# Altium PCB pay-optical.PcbDoc (part 1 of 5)
Units mm, origin at the board's own origin, x right, y up, seen from the top; angles counter-clockwise.
Board outline 128 x 54 mm, 4 copper layers (Top Layer, GND, VCC, Bottom Layer), stack 0.778 mm thick; 461 components, 247 nets, 1368 pads, 498 vias.
Unrouted connection lines stored in the file: 117.
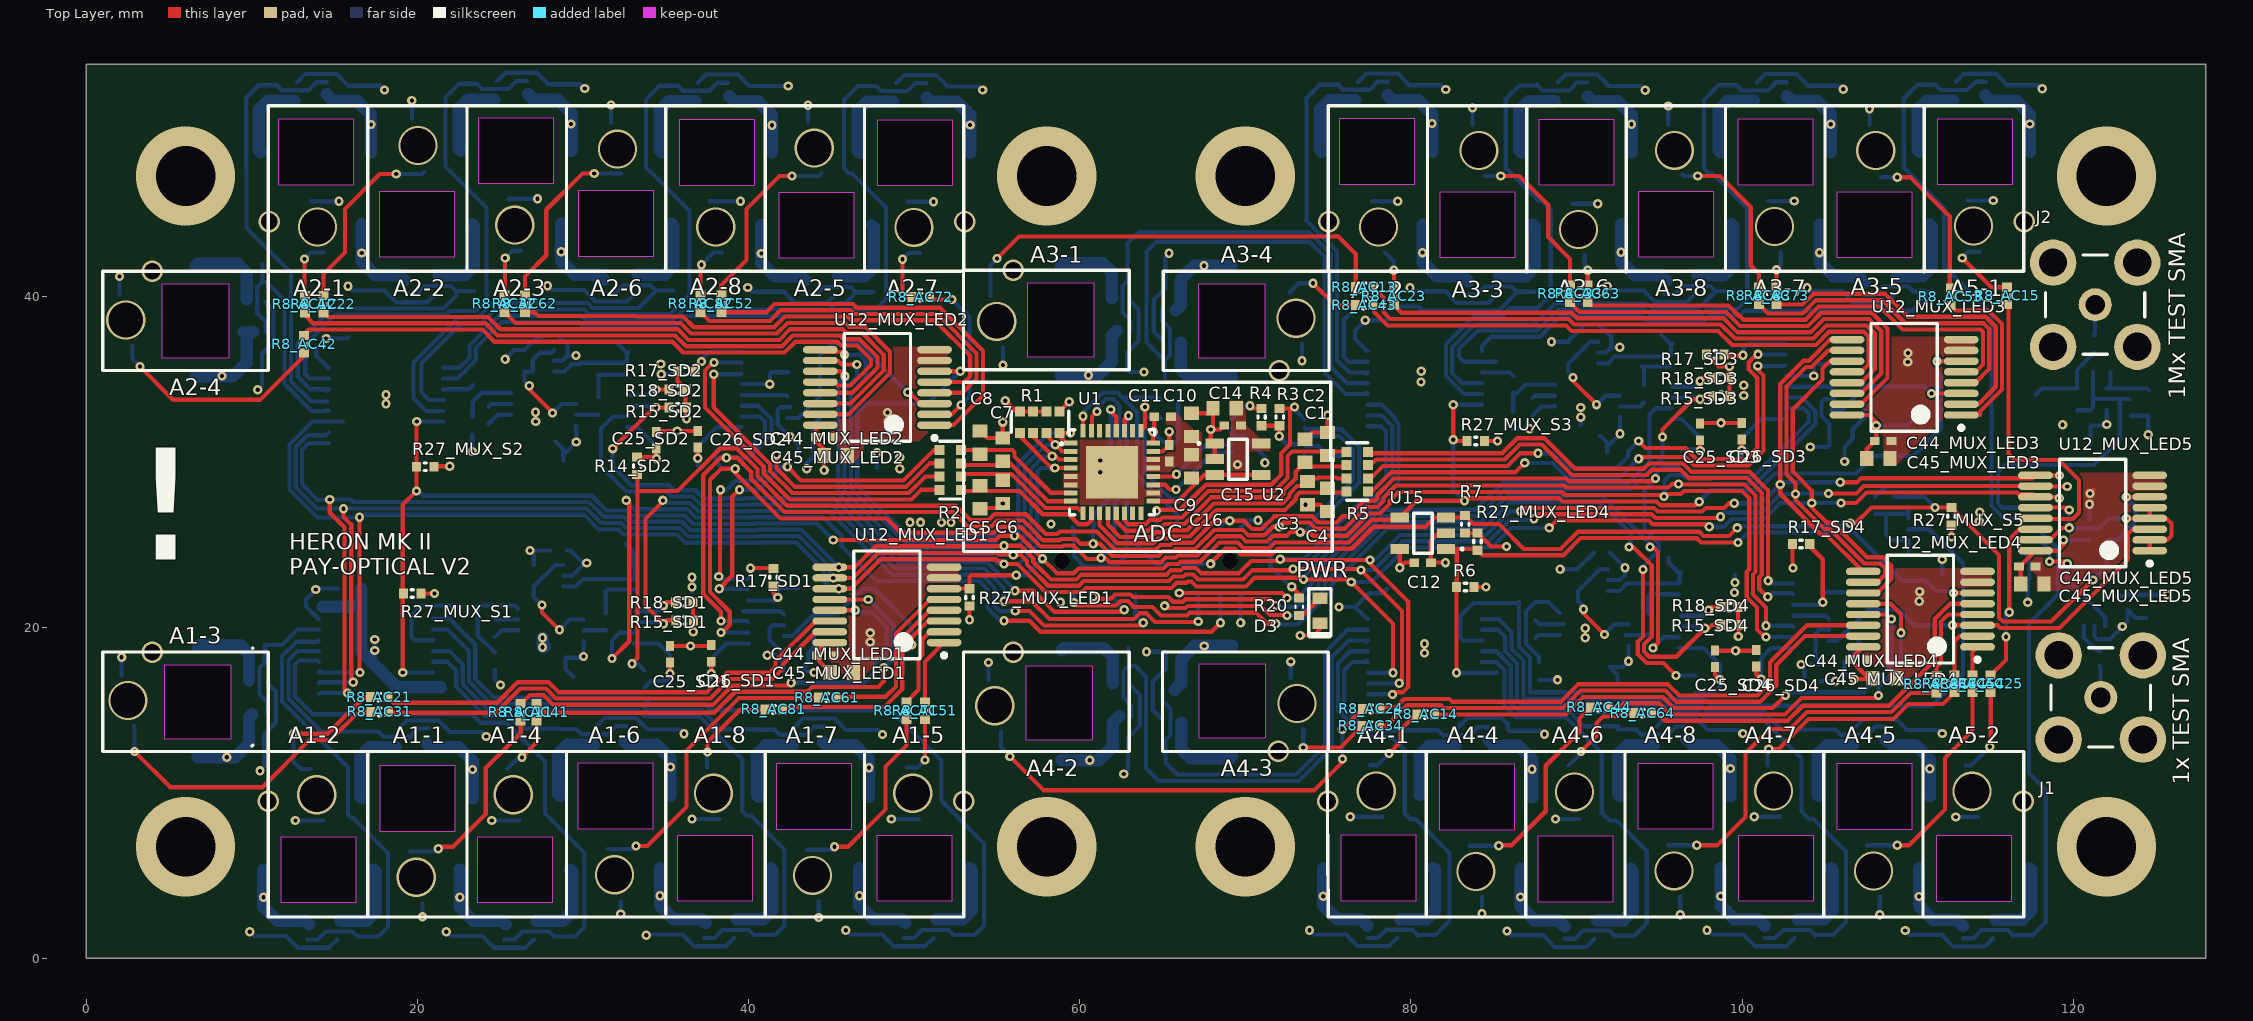
[diagram p0: Top Layer view]
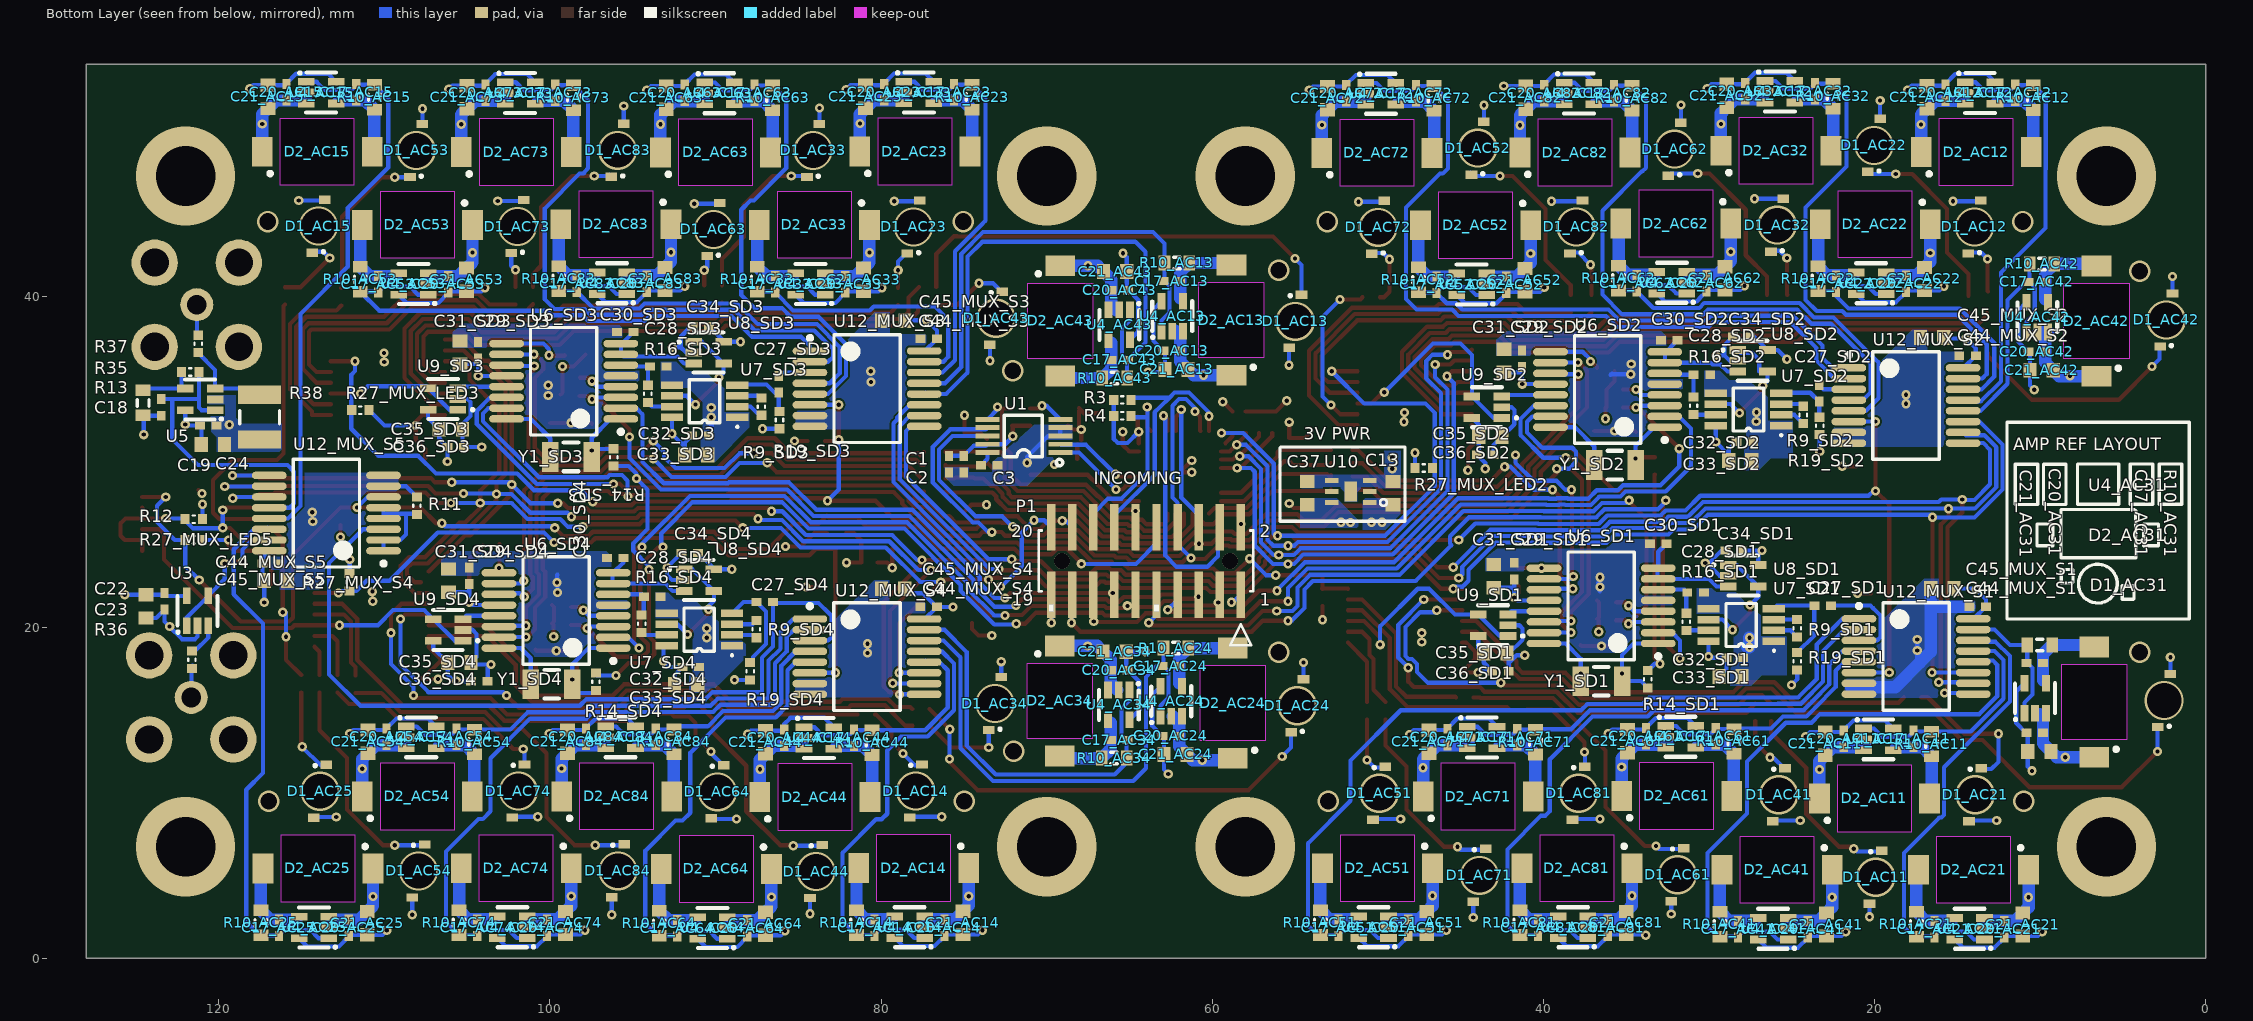
[diagram p1: Bottom Layer view, seen from below]
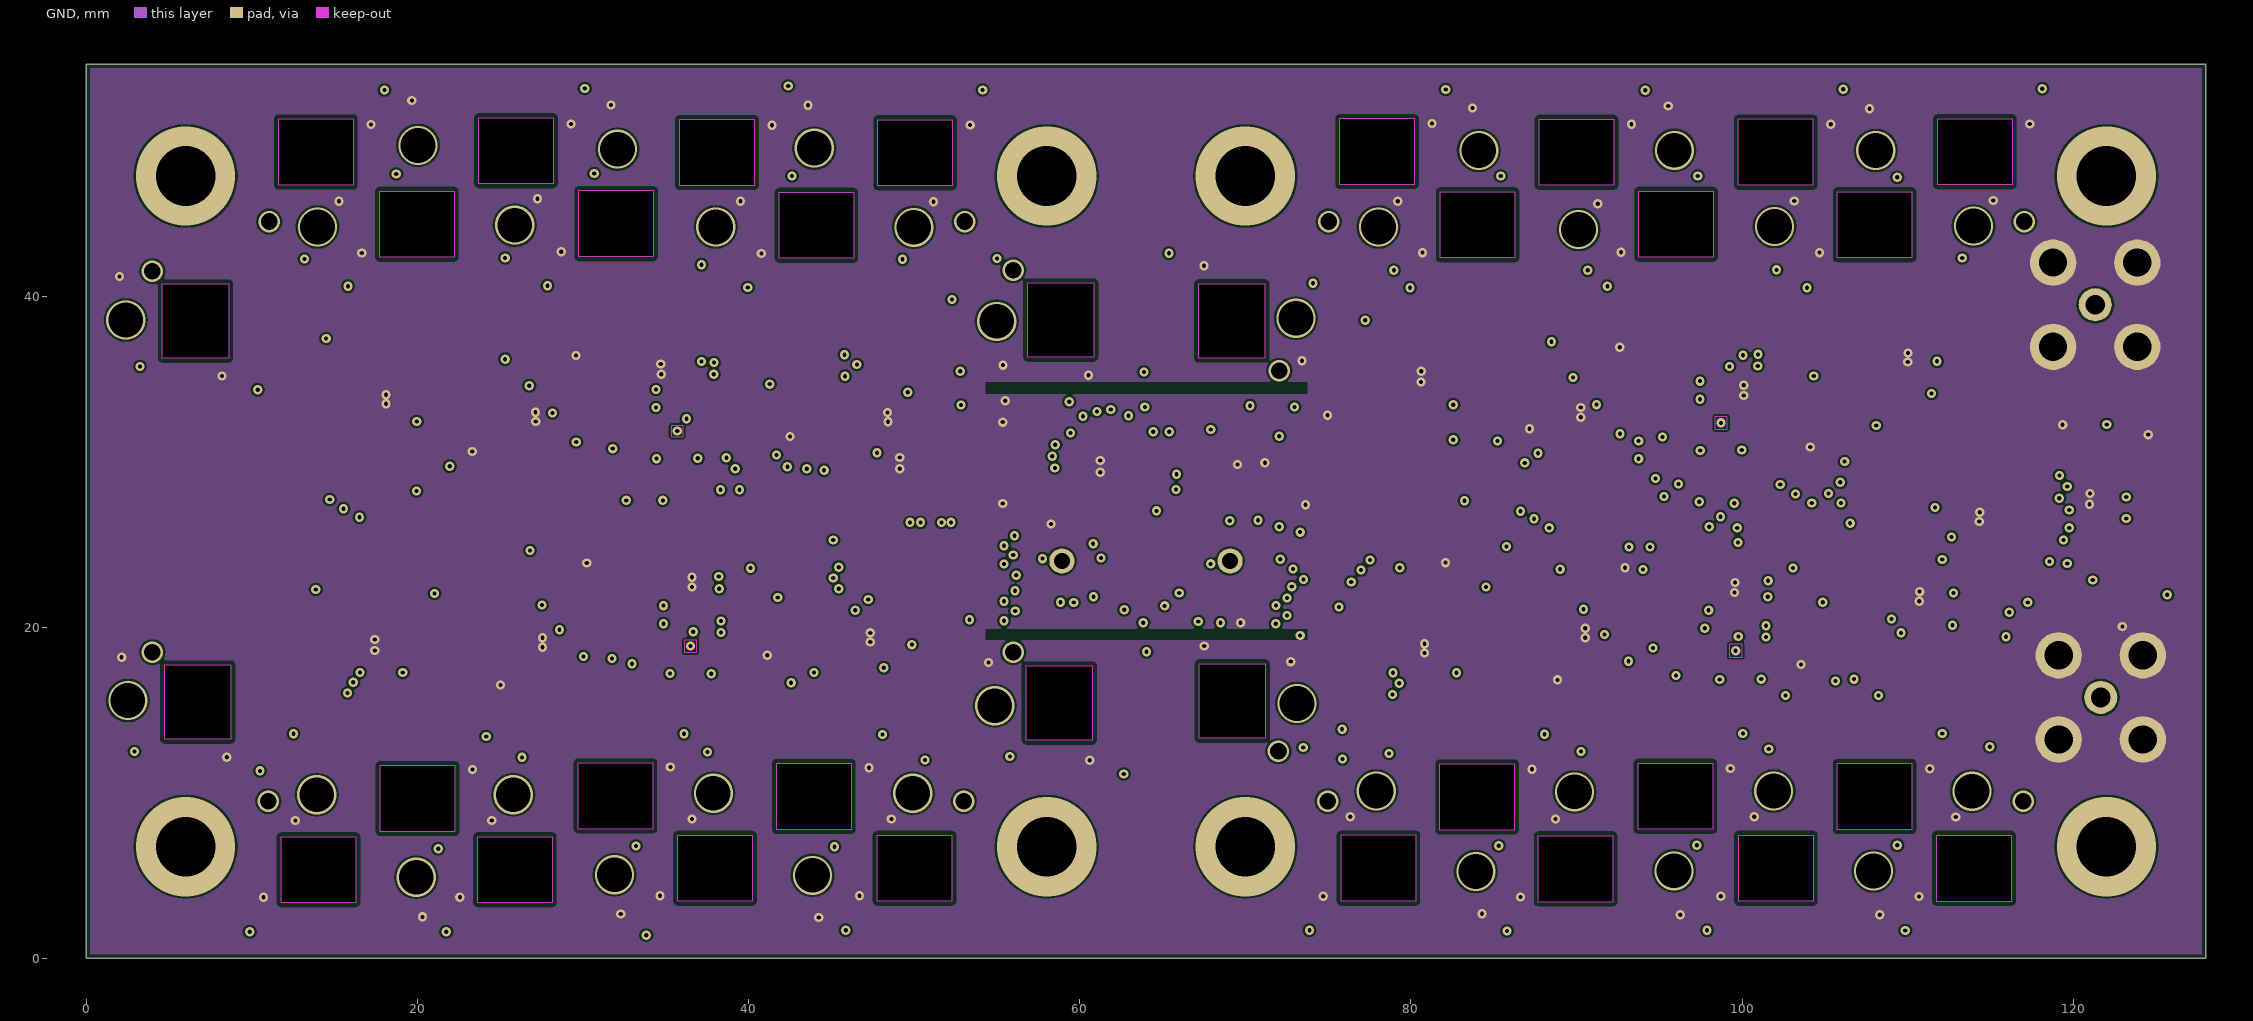
[diagram p2: GND]
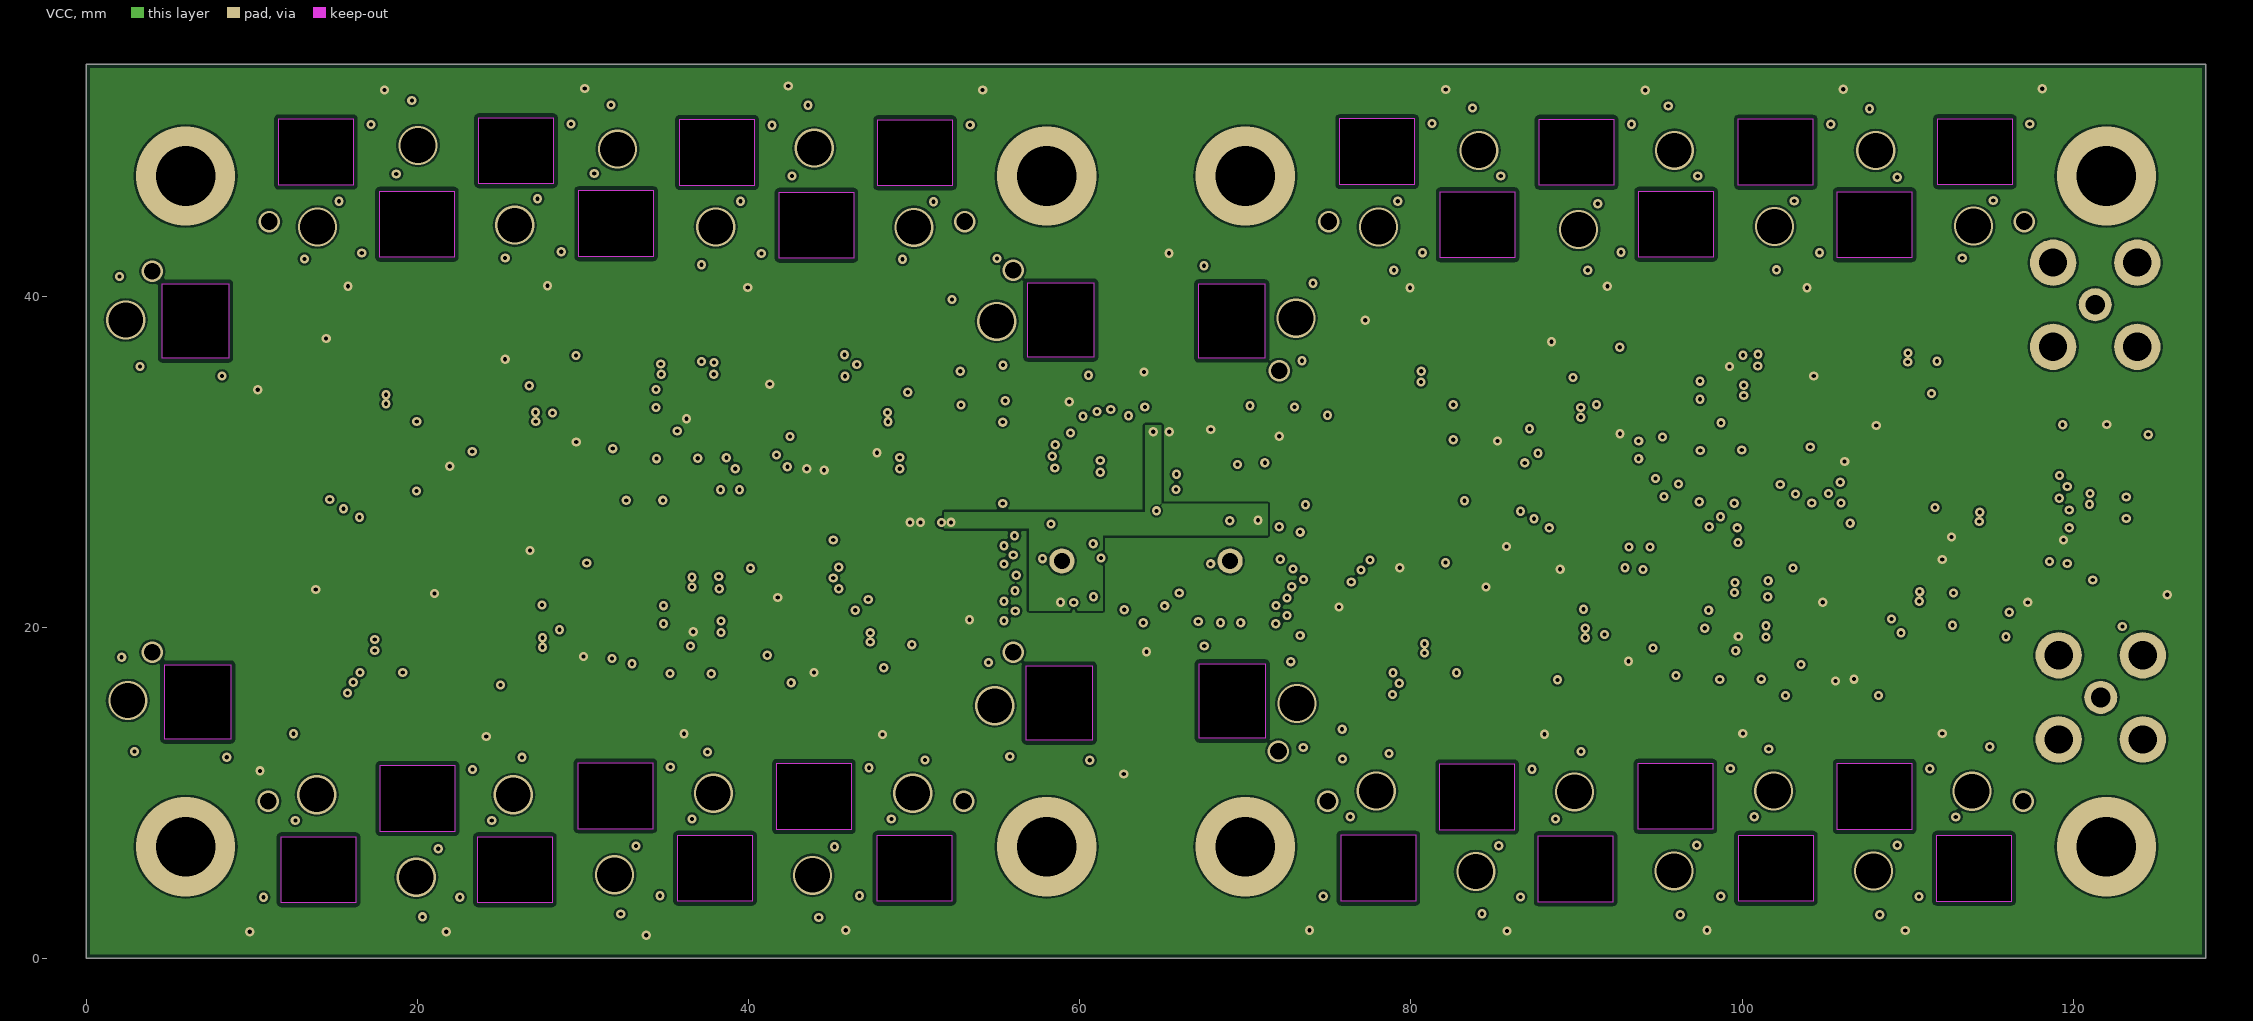
[diagram p3: VCC]

## Layer stack, top to bottom
Top Solder: solder mask 0.0102, Solder Resist, Dk 3.5
Top Layer: signal copper 0.0356
Dielectric 1: core 0.254, FR-4, Dk 4.2
GND: signal copper 0.036
Dielectric 6: prepreg 0.127, Dk 4.2
VCC: signal copper 0.036
Dielectric 4: core 0.254, Dk 4.2
Bottom Layer: signal copper 0.0356
Bottom Solder: solder mask 0.0102, Solder Resist, Dk 3.5

## Board outline
0,0 128,0 128,54 0,54

## Design rules (kind name [scope] priority, off if disabled: settings)
AssemblyTestPointUsage [All] p1 off:
AssemblyTestpoint [All] p1 off: testpointundercomponent=TRUE minsize=1.016 maxsize=2.54 preferedsize=1.524 minholesize=0 maxholesize=1.016 preferedholesize=0.813 testpointgrid=0.025 usegrid=TRUE gridtolerance=0 allowsidetop=TRUE allowsidebottom=TRUE
BoardOutlineClearance [OnLayer('VCC') or OnLayer('GND')] p1: gap=0.381 ignorepadtopadclearanceinfootprint=FALSE // Inner layer clearance
BoardOutlineClearance BoardOutlineClearance_1 [All] p2: gap=0.254 ignorepadtopadclearanceinfootprint=FALSE // top and bottom layers
Clearance [All] p1: gap=0.127 ignorepadtopadclearanceinfootprint=FALSE except(0: Arc-Hole Track-Hole SMDPad-Hole THPad-Hole Via-Hole Fill-Hole Poly-Hole Region-Hole Text-Hole)
FabricationTestPointUsage [All] p1 off: valid=0 allowmultiple=FALSE
FabricationTestpoint [All] p1 off: side=3 testpointundercomponent=FALSE minsize=1.016 maxsize=2.54 preferedsize=1.524 minholesize=0 maxholesize=1.016 preferedholesize=0.813 testpointgrid=0.025 allowsidetop=TRUE allowsidebottom=TRUE usegrid=TRUE gridtolerance=0
HoleSize [All] p1: absolutevalues=TRUE maxlimit=6.35 minlimit=0.203 maxpercent=80.000 minpercent=20.000
MinimumAnnularRing [All] p1: minimumring=0.127
MinimumSolderMaskSliver [All] p1: minsoldermaskwidth=0.102
PlaneConnect [All] p1: planeconnectstyle=Direct reliefexpansion=0.508 reliefentries=4 reliefconductorwidth=0.254 reliefairgap=0.254
PolygonConnect [All] p1: connectstyle=Direct reliefconductorwidth=0.254 reliefentries=4 polygonreliefangle="90 Angle" airgapwidth=0.254
RoomDefinition SD5_Special [InComponentClass('SD5_Special')] p1: confinementstyle=ConfineIn formatcopy=TRUE lockcomponents=FALSE outline 0,0 50.8,0 50.8,25.4 0,25.4
RoomDefinition pay-optical [InComponentClass('pay-optical')] p2: confinementstyle=ConfineIn formatcopy=TRUE lockcomponents=FALSE outline 0,0 50.8,0 50.8,25.4 0,25.4
RoomDefinition AC74 [InComponentClass('AC74')] p3: confinementstyle=ConfineIn formatcopy=TRUE lockcomponents=FALSE outline 100.928,12.156 103.239,12.156 103.239,11.512 104.289,11.512 104.289,7.711 106.339,7.711 106.339,3.19 106.337,0.596 104.039,0.596 104.039,0 100.528,0 100.528,0.296 99.629,0.296 98.329,0.296 98.127,0.296 97.683,0.296 97.728,7.711 99.978,7.711 99.978,11.512 100.928,11.512
RoomDefinition U_amplifier-special [InComponentClass('U_amplifier-special')] p4: confinementstyle=ConfineIn formatcopy=TRUE lockcomponents=FALSE outline 114.8,3.684 127.9,3.684 127.9,44.132 114.8,44.132
RoomDefinition AC62 [InComponentClass('AC62')] p5: confinementstyle=ConfineIn formatcopy=TRUE lockcomponents=FALSE outline 30.901,51.613 33.212,51.613 33.212,50.436 34.262,50.436 34.262,46.634 36.312,46.634 36.312,42.113 36.31,39.52 34.012,39.52 34.012,38.923 30.501,38.923 30.501,39.22 29.602,39.22 28.302,39.22 28.1,39.22 27.656,39.22 27.701,46.634 29.951,46.634 29.951,50.436 30.901,50.436
RoomDefinition AC12 [InComponentClass('AC12')] p6: confinementstyle=ConfineIn formatcopy=TRUE lockcomponents=FALSE outline 14.973,41.988 12.662,41.988 12.662,42.632 11.612,42.632 11.612,46.433 9.562,46.433 9.562,50.955 9.564,53.548 11.862,53.548 11.862,54.144 15.373,54.144 15.373,53.848 16.271,53.848 17.571,53.848 17.773,53.848 18.217,53.848 18.173,46.433 15.923,46.433 15.923,42.632 14.973,42.632
RoomDefinition MUX_S1 [InComponentClass('MUX_S1')] p7: confinementstyle=ConfineIn formatcopy=TRUE lockcomponents=FALSE outline 12.442,14.432 12.442,22.04 14.408,22.04 14.408,23.189 17.416,23.189 17.416,22.04 22.55,22.04 22.55,14.432
RoomDefinition U_dac-layout [InComponentClass('U_dac-layout')] p8: confinementstyle=ConfineIn formatcopy=TRUE lockcomponents=FALSE outline 67.925,27.875 76.5,27.875 76.5,34.125 67.925,34.125
RoomDefinition U_adc-optical [InComponentClass('U_adc-optical')] p9: confinementstyle=ConfineIn formatcopy=TRUE lockcomponents=FALSE outline 51.901,29.291 51.901,30.602 56.861,30.602 56.861,34.057 61.938,34.057 61.938,33.14 70.094,33.14 70.094,30.162 70.985,30.162 70.985,24.705 75.718,24.705 75.718,22.241 76.157,22.241 76.157,20.533 60.149,20.533 60.149,21.051 56.257,21.051 56.257,21.897 54.31,21.897 54.31,25.374 53.092,25.374 53.092,29.291
RoomDefinition SD4 [InComponentClass('SD4')] p10: confinementstyle=ConfineIn formatcopy=TRUE lockcomponents=FALSE outline 85.816,20.87 85.816,22.178 89.238,22.178 89.238,24.435 90.338,24.435 90.338,25.14 92.746,25.14 92.746,24.835 97.267,24.835 97.267,24.318 105.519,24.318 105.519,24.313 106.964,24.313 106.964,21.423 107.902,21.423 107.902,18.248 107.574,18.248 107.574,16.901 106.995,16.901 106.995,15.907 102.004,15.907 102.004,15.153 97.793,15.153 97.793,15.405 96.525,15.405 96.525,15.677 90.266,15.677 90.266,16.191 87.076,16.191 87.076,18.733 86.873,18.733 86.873,20.87
RoomDefinition SD3 [InComponentClass('SD3')] p11: confinementstyle=ConfineIn formatcopy=TRUE lockcomponents=FALSE outline 85.702,31.498 85.702,33.809 85.727,33.809 85.727,35.821 88.651,35.821 88.651,38.174 89.888,38.174 89.888,38.703 92.296,38.703 92.296,38.657 104.218,38.657 104.218,38.095 106.287,38.095 106.287,35.371 108.212,35.371 108.212,32.196 107.751,32.196 107.751,30.262 100.829,30.262 100.829,29.033 96.618,29.033 96.618,29.085 95.659,29.085 95.659,29.706 89.651,29.706 89.651,31.498
RoomDefinition SD2 [InComponentClass('SD2')] p12: confinementstyle=ConfineIn formatcopy=TRUE lockcomponents=FALSE outline 22.662,31.001 22.662,33.312 22.687,33.312 22.687,35.324 25.611,35.324 25.611,37.676 26.848,37.676 26.848,38.206 29.256,38.206 29.256,38.159 41.177,38.159 41.177,37.597 43.247,37.597 43.247,34.874 45.171,34.874 45.171,31.699 44.71,31.699 44.71,29.764 37.789,29.764 37.789,28.536 33.578,28.536 33.578,28.588 32.618,28.588 32.618,29.209 26.61,29.209 26.61,31.001
RoomDefinition SD1 [InComponentClass('SD1')] p13: confinementstyle=ConfineIn formatcopy=TRUE lockcomponents=FALSE outline 23.495,17.075 23.495,19.386 23.522,19.386 23.522,21.512 24.771,21.512 24.771,21.703 25.457,21.703 25.457,24.657 25.715,24.657 25.715,25.201 40.055,25.201 40.055,25.612 43.063,25.612 43.063,21.814 45.628,21.814 45.628,18.639 45.167,18.639 45.167,16.705 38.245,16.705 38.245,15.476 34.034,15.476 34.034,15.525 32.537,15.525 32.537,16.341 27.586,16.341 27.586,16.767 24.907,16.767 24.907,17.075
RoomDefinition MUX_S5 [InComponentClass('MUX_S5')] p14: confinementstyle=ConfineIn formatcopy=TRUE lockcomponents=FALSE outline 118.698,31.229 118.698,23.157 116.703,23.157 116.703,21.938 113.65,21.938 113.65,23.157 108.438,23.157 108.438,31.229
RoomDefinition MUX_S4 [InComponentClass('MUX_S4')] p15: confinementstyle=ConfineIn formatcopy=TRUE lockcomponents=FALSE outline 75.796,14.418 75.796,22.026 77.761,22.026 77.761,23.175 80.769,23.175 80.769,22.026 85.904,22.026 85.904,14.418
RoomDefinition MUX_S3 [InComponentClass('MUX_S3')] p16: confinementstyle=ConfineIn formatcopy=TRUE lockcomponents=FALSE outline 75.789,30.603 75.789,38.211 77.755,38.211 77.755,39.36 80.763,39.36 80.763,38.211 85.897,38.211 85.897,30.603
RoomDefinition MUX_S2 [InComponentClass('MUX_S2')] p17: confinementstyle=ConfineIn formatcopy=TRUE lockcomponents=FALSE outline 13.051,29.587 13.051,37.195 15.017,37.195 15.017,38.344 18.025,38.344 18.025,37.195 23.159,37.195 23.159,29.587
RoomDefinition MUX_LED5 [InComponentClass('MUX_LED5')] p18: confinementstyle=ConfineIn formatcopy=TRUE lockcomponents=FALSE outline 116.408,21.151 116.408,27.526 117.745,27.526 117.745,30.666 123.273,30.666 123.273,29.947 126.213,29.947 126.213,21.321 123.314,21.321 123.314,21.151
RoomDefinition MUX_LED4 [InComponentClass('MUX_LED4')] p19: confinementstyle=ConfineIn formatcopy=TRUE lockcomponents=FALSE outline 105.711,17.289 105.711,24.897 110.909,24.897 110.909,27.406 112.221,27.406 112.221,24.897 115.819,24.897 115.819,17.289 109.548,17.289 109.548,16.161 106.54,16.161 106.54,17.289
RoomDefinition MUX_LED3 [InComponentClass('MUX_LED3')] p20: confinementstyle=ConfineIn formatcopy=TRUE lockcomponents=FALSE outline 104.729,31.288 104.729,38.896 114.837,38.896 114.837,31.288 111.781,31.288 111.781,29.528 109.73,29.528 109.73,29.347 106.722,29.347 106.722,31.288
RoomDefinition MUX_LED2 [InComponentClass('MUX_LED2')] p21: confinementstyle=ConfineIn formatcopy=TRUE lockcomponents=FALSE outline 43.028,28.737 43.028,35.112 44.365,35.112 44.365,38.252 49.893,38.252 49.893,37.534 52.832,37.534 52.832,28.907 49.933,28.907 49.933,28.737
RoomDefinition MUX_LED1 [InComponentClass('MUX_LED1')] p22: confinementstyle=ConfineIn formatcopy=TRUE lockcomponents=FALSE outline 43.303,17.546 43.303,25.154 48.502,25.154 48.502,27.664 49.813,27.664 49.813,25.154 53.411,25.154 53.411,17.546 47.14,17.546 47.14,16.418 44.132,16.418 44.132,17.546
RoomDefinition AC84 [InComponentClass('AC84')] p23: confinementstyle=ConfineIn formatcopy=TRUE lockcomponents=FALSE outline 97.07,2.546 94.759,2.546 94.759,3.723 93.709,3.723 93.709,7.525 91.659,7.525 91.659,12.046 91.661,14.639 93.959,14.639 93.959,15.236 97.47,15.236 97.47,14.939 98.369,14.939 99.669,14.939 99.871,14.939 100.315,14.939 100.27,7.525 98.02,7.525 98.02,3.723 97.07,3.723
RoomDefinition AC83 [InComponentClass('AC83')] p24: confinementstyle=ConfineIn formatcopy=TRUE lockcomponents=FALSE outline 94.906,51.046 97.217,51.046 97.217,50.403 98.268,50.403 98.268,46.601 100.318,46.601 100.318,42.08 100.316,39.487 98.018,39.487 98.018,38.89 94.506,38.89 94.506,39.187 93.608,39.187 92.308,39.187 92.106,39.187 91.662,39.187 91.706,46.601 93.956,46.601 93.956,50.403 94.906,50.403
RoomDefinition AC82 [InComponentClass('AC82')] p25: confinementstyle=ConfineIn formatcopy=TRUE lockcomponents=FALSE outline 33.786,46.406 33.786,50.927 33.788,50.927 33.788,53.458 35.078,53.458 35.078,53.463 36.099,53.463 36.099,53.834 39.61,53.834 39.61,53.481 41.92,53.481 41.92,50.927 42.397,50.927 42.397,46.406 39.83,46.406 39.83,42.015 39.021,42.015 39.021,41.026 36.71,41.026 36.71,42.015 36.206,42.015 36.206,46.406
RoomDefinition AC81 [InComponentClass('AC81')] p26: confinementstyle=ConfineIn formatcopy=TRUE lockcomponents=FALSE outline 36.868,12.156 39.179,12.156 39.179,11.512 40.23,11.512 40.23,7.711 42.28,7.711 42.28,3.19 42.278,0.596 39.98,0.596 39.98,0 36.468,0 36.468,0.296 35.57,0.296 34.27,0.296 34.068,0.296 33.624,0.296 33.668,7.711 35.918,7.711 35.918,11.512 36.868,11.512
RoomDefinition AC73 [InComponentClass('AC73')] p27: confinementstyle=ConfineIn formatcopy=TRUE lockcomponents=FALSE outline 103.135,41.453 100.824,41.453 100.824,42.63 99.774,42.63 99.774,46.431 97.724,46.431 97.724,50.952 97.726,53.546 100.024,53.546 100.024,54.142 103.535,54.142 103.535,53.846 104.433,53.846 105.733,53.846 105.935,53.846 106.38,53.846 106.335,46.431 104.085,46.431 104.085,42.63 103.135,42.63
RoomDefinition AC72 [InComponentClass('AC72')] p28: confinementstyle=ConfineIn formatcopy=TRUE lockcomponents=FALSE outline 51.161,41.407 48.85,41.407 48.85,42.584 47.799,42.584 47.799,46.385 45.749,46.385 45.749,50.906 45.751,53.5 48.05,53.5 48.05,54.096 51.561,54.096 51.561,53.8 52.459,53.8 53.759,53.8 53.961,53.8 54.405,53.8 54.361,46.385 52.111,46.385 52.111,42.584 51.161,42.584
RoomDefinition AC71 [InComponentClass('AC71')] p29: confinementstyle=ConfineIn formatcopy=TRUE lockcomponents=FALSE outline 45.046,3.021 42.735,3.021 42.735,3.664 41.685,3.664 41.685,7.466 39.635,7.466 39.635,11.987 39.637,14.58 41.935,14.58 41.935,15.177 45.446,15.177 45.446,14.88 46.344,14.88 47.644,14.88 47.846,14.88 48.291,14.88 48.246,7.466 45.996,7.466 45.996,3.664 45.046,3.664
RoomDefinition AC64 [InComponentClass('AC64')] p30: confinementstyle=ConfineIn formatcopy=TRUE lockcomponents=FALSE outline 88.838,12.111 91.149,12.111 91.149,11.467 92.199,11.467 92.199,7.666 94.249,7.666 94.249,3.144 94.247,0.551 91.949,0.551 91.949,-0.045 88.438,-0.045 88.438,0.251 87.539,0.251 86.239,0.251 86.038,0.251 85.593,0.251 85.638,7.666 87.888,7.666 87.888,11.467 88.838,11.467
RoomDefinition AC63 [InComponentClass('AC63')] p31: confinementstyle=ConfineIn formatcopy=TRUE lockcomponents=FALSE outline 91.102,41.97 88.791,41.97 88.791,42.613 87.741,42.613 87.741,46.415 85.691,46.415 85.691,50.936 85.693,53.529 87.991,53.529 87.991,54.126 91.502,54.126 91.502,53.829 92.401,53.829 93.701,53.829 93.903,53.829 94.347,53.829 94.302,46.415 92.052,46.415 92.052,42.613 91.102,42.613
RoomDefinition AC61 [InComponentClass('AC61')] p32: confinementstyle=ConfineIn formatcopy=TRUE lockcomponents=FALSE outline 33.057,3.059 30.746,3.059 30.746,3.703 29.696,3.703 29.696,7.504 27.646,7.504 27.646,12.026 27.648,14.619 29.946,14.619 29.946,15.215 33.457,15.215 33.457,14.919 34.356,14.919 35.656,14.919 35.858,14.919 36.302,14.919 36.257,7.504 34.007,7.504 34.007,3.703 33.057,3.703
RoomDefinition AC54 [InComponentClass('AC54')] p33: confinementstyle=ConfineIn formatcopy=TRUE lockcomponents=FALSE outline 109.11,2.541 106.799,2.541 106.799,3.718 105.749,3.718 105.749,7.519 103.699,7.519 103.699,12.04 103.701,14.634 105.999,14.634 105.999,15.23 109.51,15.23 109.51,14.934 110.408,14.934 111.708,14.934 111.91,14.934 112.354,14.934 112.31,7.519 110.06,7.519 110.06,3.718 109.11,3.718
RoomDefinition AC53 [InComponentClass('AC53')] p34: confinementstyle=ConfineIn formatcopy=TRUE lockcomponents=FALSE outline 106.893,51.537 109.204,51.537 109.204,50.36 110.254,50.36 110.254,46.558 112.304,46.558 112.304,42.037 112.302,39.444 110.004,39.444 110.004,38.847 106.493,38.847 106.493,39.144 105.594,39.144 104.294,39.144 104.092,39.144 103.648,39.144 103.693,46.558 105.943,46.558 105.943,50.36 106.893,50.36
RoomDefinition AC52 [InComponentClass('AC52')] p35: confinementstyle=ConfineIn formatcopy=TRUE lockcomponents=FALSE outline 42.991,50.978 45.302,50.978 45.302,50.334 46.352,50.334 46.352,46.533 48.402,46.533 48.402,42.012 48.401,39.418 46.102,39.418 46.102,38.822 42.591,38.822 42.591,39.118 41.693,39.118 40.393,39.118 40.191,39.118 39.747,39.118 39.791,46.533 42.041,46.533 42.041,50.334 42.991,50.334
RoomDefinition AC51 [InComponentClass('AC51')] p36: confinementstyle=ConfineIn formatcopy=TRUE lockcomponents=FALSE outline 48.914,12.156 51.225,12.156 51.225,11.512 52.275,11.512 52.275,7.711 54.325,7.711 54.325,3.19 54.323,0.596 52.025,0.596 52.025,0 48.514,0 48.514,0.296 47.616,0.296 46.316,0.296 46.114,0.296 45.669,0.296 45.714,7.711 47.964,7.711 47.964,11.512 48.914,11.512
RoomDefinition AC44 [InComponentClass('AC44')] p37: confinementstyle=ConfineIn formatcopy=TRUE lockcomponents=FALSE outline 85.098,2.504 82.787,2.504 82.787,3.681 81.737,3.681 81.737,7.482 79.687,7.482 79.687,12.004 79.688,14.597 81.987,14.597 81.987,15.193 85.498,15.193 85.498,14.897 86.396,14.897 87.696,14.897 87.898,14.897 88.342,14.897 88.298,7.482 86.048,7.482 86.048,3.681 85.098,3.681
RoomDefinition AC43 [InComponentClass('AC43')] p38: confinementstyle=ConfineIn formatcopy=TRUE lockcomponents=FALSE outline 76.418,39.605 76.418,37.294 75.241,37.294 75.241,36.244 71.44,36.244 71.44,34.194 66.918,34.194 64.325,34.196 64.325,36.494 63.729,36.494 63.729,40.005 64.025,40.005 64.025,40.904 64.025,42.204 64.025,42.406 64.025,42.85 71.44,42.805 71.44,40.555 75.241,40.555 75.241,39.605
RoomDefinition AC42 [InComponentClass('AC42')] p39: confinementstyle=ConfineIn formatcopy=TRUE lockcomponents=FALSE outline 0.6,37.384 0.6,39.695 1.662,39.695 1.662,40.745 5.094,40.745 5.094,42.795 9.175,42.795 11.515,42.793 11.515,40.495 12.054,40.495 12.054,36.984 11.786,36.984 11.786,36.085 11.786,34.785 11.786,34.583 11.786,34.139 5.094,34.184 5.094,36.434 1.662,36.434 1.662,37.384
RoomDefinition AC41 [InComponentClass('AC41')] p40: confinementstyle=ConfineIn formatcopy=TRUE lockcomponents=FALSE outline 24.784,12.063 27.095,12.063 27.095,11.42 28.145,11.42 28.145,7.618 30.195,7.618 30.195,3.097 30.193,0.504 27.895,0.504 27.895,-0.093 24.384,-0.093 24.384,0.204 23.486,0.204 22.186,0.204 21.984,0.204 21.539,0.204 21.584,7.618 23.834,7.618 23.834,11.42 24.784,11.42
RoomDefinition AC34 [InComponentClass('AC34')] p41: confinementstyle=ConfineIn formatcopy=TRUE lockcomponents=FALSE outline 75.915,16.652 75.915,14.341 75.271,14.341 75.271,13.291 71.47,13.291 71.47,11.241 66.948,11.241 64.355,11.243 64.355,13.541 63.759,13.541 63.759,17.052 64.055,17.052 64.055,17.951 64.055,19.251 64.055,19.453 64.055,19.897 71.47,19.852 71.47,17.602 75.271,17.602 75.271,16.652
RoomDefinition AC33 [InComponentClass('AC33')] p42: confinementstyle=ConfineIn formatcopy=TRUE lockcomponents=FALSE outline 82.92,51.537 85.231,51.537 85.231,50.36 86.281,50.36 86.281,46.558 88.331,46.558 88.331,42.037 88.329,39.444 86.031,39.444 86.031,38.847 82.52,38.847 82.52,39.144 81.622,39.144 80.322,39.144 80.12,39.144 79.675,39.144 79.72,46.558 81.97,46.558 81.97,50.36 82.92,50.36
RoomDefinition AC32 [InComponentClass('AC32')] p43: confinementstyle=ConfineIn formatcopy=TRUE lockcomponents=FALSE outline 27.062,41.537 24.751,41.537 24.751,42.714 23.701,42.714 23.701,46.515 21.651,46.515 21.651,51.036 21.653,53.63 23.951,53.63 23.951,54.226 27.462,54.226 27.462,53.93 28.36,53.93 29.66,53.93 29.862,53.93 30.307,53.93 30.262,46.515 28.012,46.515 28.012,42.714 27.062,42.714
RoomDefinition AC31 [InComponentClass('AC31')] p44: confinementstyle=ConfineIn formatcopy=TRUE lockcomponents=FALSE outline 0.033,14.37 0.033,16.681 0.677,16.681 0.677,17.731 4.478,17.731 4.478,19.781 8.999,19.781 11.593,19.78 11.593,17.481 12.189,17.481 12.189,13.97 11.893,13.97 11.893,13.072 11.893,11.772 11.893,11.57 11.893,11.126 4.478,11.17 4.478,13.42 0.677,13.42 0.677,14.37
RoomDefinition AC25 [InComponentClass('AC25')] p45: confinementstyle=ConfineIn formatcopy=TRUE lockcomponents=FALSE outline 112.898,12.142 115.209,12.142 115.209,11.51 116.259,11.51 116.259,7.775 118.309,7.775 118.309,3.334 118.307,0.786 116.009,0.786 116.009,0.2 112.498,0.2 112.498,0.491 111.599,0.491 110.299,0.491 110.098,0.491 109.653,0.491 109.698,7.775 111.948,7.775 111.948,11.51 112.898,11.51
RoomDefinition AC24 [InComponentClass('AC24')] p46: confinementstyle=ConfineIn formatcopy=TRUE lockcomponents=FALSE outline 52.202,14.186 52.202,16.498 52.845,16.498 52.845,17.548 56.647,17.548 56.647,19.598 61.168,19.598 63.761,19.596 63.761,17.298 64.358,17.298 64.358,13.786 64.061,13.786 64.061,12.888 64.061,11.588 64.061,11.386 64.061,10.942 56.647,10.987 56.647,13.237 52.845,13.237 52.845,14.186
RoomDefinition AC23 [InComponentClass('AC23')] p47: confinementstyle=ConfineIn formatcopy=TRUE lockcomponents=FALSE outline 79.059,42.018 76.748,42.018 76.748,42.661 75.698,42.661 75.698,46.463 73.648,46.463 73.648,50.984 73.65,53.577 75.948,53.577 75.948,54.174 79.459,54.174 79.459,53.877 80.358,53.877 81.658,53.877 81.86,53.877 82.304,53.877 82.259,46.463 80.009,46.463 80.009,42.661 79.059,42.661
RoomDefinition AC22 [InComponentClass('AC22')] p48: confinementstyle=ConfineIn formatcopy=TRUE lockcomponents=FALSE outline 18.86,51.275 21.171,51.275 21.171,50.619 22.222,50.619 22.222,46.746 24.272,46.746 24.272,42.14 24.27,39.497 21.972,39.497 21.972,38.89 18.46,38.89 18.46,39.192 17.562,39.192 16.262,39.192 16.06,39.192 15.616,39.192 15.66,46.746 17.91,46.746 17.91,50.619 18.86,50.619
RoomDefinition AC21 [InComponentClass('AC21')] p49: confinementstyle=ConfineIn formatcopy=TRUE lockcomponents=FALSE outline 12.922,12.063 15.233,12.063 15.233,11.42 16.283,11.42 16.283,7.618 18.333,7.618 18.333,3.097 18.332,0.504 16.033,0.504 16.033,-0.093 12.522,-0.093 12.522,0.204 11.624,0.204 10.324,0.204 10.122,0.204 9.678,0.204 9.722,7.618 11.972,7.618 11.972,11.42 12.922,11.42
RoomDefinition AC15 [InComponentClass('AC15')] p50: confinementstyle=ConfineIn formatcopy=TRUE lockcomponents=FALSE outline 115.155,41.479 112.844,41.479 112.844,42.656 111.794,42.656 111.794,46.457 109.744,46.457 109.744,50.978 109.746,53.572 112.044,53.572 112.044,54.168 115.555,54.168 115.555,53.872 116.454,53.872 117.754,53.872 117.956,53.872 118.4,53.872 118.355,46.457 116.105,46.457 116.105,42.656 115.155,42.656
RoomDefinition AC14 [InComponentClass('AC14')] p51: confinementstyle=ConfineIn formatcopy=TRUE lockcomponents=FALSE outline 76.925,12.182 79.236,12.182 79.236,11.538 80.286,11.538 80.286,7.737 82.336,7.737 82.336,3.216 82.334,0.622 80.036,0.622 80.036,0.026 76.525,0.026 76.525,0.322 75.626,0.322 74.326,0.322 74.124,0.322 73.68,0.322 73.725,7.737 75.975,7.737 75.975,11.538 76.925,11.538
RoomDefinition AC13 [InComponentClass('AC13')] p52: confinementstyle=ConfineIn formatcopy=TRUE lockcomponents=FALSE outline 51.606,37.441 51.606,39.752 52.783,39.752 52.783,40.802 56.585,40.802 56.585,42.852 61.106,42.852 63.699,42.851 63.699,40.552 64.296,40.552 64.296,37.041 63.999,37.041 63.999,36.143 63.999,34.843 63.999,34.641 63.999,34.197 56.585,34.241 56.585,36.491 52.783,36.491 52.783,37.441
RoomDefinition AC11 [InComponentClass('AC11')] p53: confinementstyle=ConfineIn formatcopy=TRUE lockcomponents=FALSE outline 21.113,2.905 18.802,2.905 18.802,3.548 17.752,3.548 17.752,7.35 15.702,7.35 15.702,11.871 15.704,14.464 18.002,14.464 18.002,15.061 21.513,15.061 21.513,14.764 22.412,14.764 23.712,14.764 23.914,14.764 24.358,14.764 24.313,7.35 22.063,7.35 22.063,3.548 21.113,3.548
RoutingVias [All] p1: holewidth=0.254 width=0.559 viastyle="Through Hole" minholewidth=0.254 minwidth=0.559 maxholewidth=12.7 maxwidth=12.7
SilkToSilkClearance [All] p1: silktosilkclearance=0
SilkToSolderMaskClearance [IsPad] p1: minsilkscreentomaskgap=0.076 clearancetoexposedcopper=TRUE
SolderMaskExpansion [All] p1: expansion=0.102
Width [All] p1: maxlimit=254 minlimit=0.152 preferedwidth=0.254
21 further rules are at their usual default settings.

## Classes and differential pairs
component class SD5_Special: R11 R12
component class U_amplifier-special: C18 C19 C22 C23 C24 J1 J2 R13 R35 R36 R37 R38 U3 U5
channel class mux-optical: MUX_LED1 MUX_LED2 MUX_LED3 MUX_LED4 MUX_LED5 MUX_S1 MUX_S2 MUX_S3 MUX_S4 MUX_S5
channel class filtering-optical: SD1 SD2 SD3 SD4 SD5_Special
channel class amplifier-chain: AC11 AC12 AC13 AC14 AC15 AC21 AC22 AC23 AC24 AC25 AC31 AC32 AC33 AC34 AC35 AC41 AC42 AC43 AC44 AC45 AC51 AC52 AC53 AC54 AC55 AC61 AC62 AC63 AC64 AC65 AC71 AC72 AC73 AC74 AC75 AC81 AC82 AC83 AC84 AC85
component class U_dac-layout: C1 C2 C3 R3 R4 U1
component class U_adc-optical: C1 C2 C3 C4 C5 C6 C7 C8 C9 C10 C11 C12 C14 C15 C16 R1 R2 R3 R4 R5 R6 R7 U1 U2 U15
component class SD4: C25_SD4 C26_SD4 C27_SD4 C28_SD4 C29_SD4 C30_SD4 C31_SD4 C32_SD4 C33_SD4 C34_SD4 C35_SD4 C36_SD4 R9_SD4 R14_SD4 R15_SD4 R16_SD4 R17_SD4 R18_SD4 R19_SD4 U6_SD4 U7_SD4 U8_SD4 U9_SD4 Y1_SD4
component class SD3: C25_SD3 C26_SD3 C27_SD3 C28_SD3 C29_SD3 C30_SD3 C31_SD3 C32_SD3 C33_SD3 C34_SD3 C35_SD3 C36_SD3 R9_SD3 R14_SD3 R15_SD3 R16_SD3 R17_SD3 R18_SD3 R19_SD3 U6_SD3 U7_SD3 U8_SD3 U9_SD3 Y1_SD3
component class SD2: C25_SD2 C26_SD2 C27_SD2 C28_SD2 C29_SD2 C30_SD2 C31_SD2 C32_SD2 C33_SD2 C34_SD2 C35_SD2 C36_SD2 R9_SD2 R14_SD2 R15_SD2 R16_SD2 R17_SD2 R18_SD2 R19_SD2 U6_SD2 U7_SD2 U8_SD2 U9_SD2 Y1_SD2
component class SD1: C25_SD1 C26_SD1 C27_SD1 C28_SD1 C29_SD1 C30_SD1 C31_SD1 C32_SD1 C33_SD1 C34_SD1 C35_SD1 C36_SD1 R9_SD1 R14_SD1 R15_SD1 R16_SD1 R17_SD1 R18_SD1 R19_SD1 U6_SD1 U7_SD1 U8_SD1 U9_SD1 Y1_SD1
component class pay-optical: C13 C37 C? D3 P1 R20 U10
component class MUX_S5: C44_MUX_S5 C45_MUX_S5 R27_MUX_S5 U12_MUX_S5
component class MUX_S4: C44_MUX_S4 C45_MUX_S4 R27_MUX_S4 U12_MUX_S4
component class MUX_S3: C44_MUX_S3 C45_MUX_S3 R27_MUX_S3 U12_MUX_S3
component class MUX_S2: C44_MUX_S2 C45_MUX_S2 R27_MUX_S2 U12_MUX_S2
component class MUX_S1: C44_MUX_S1 C45_MUX_S1 R27_MUX_S1 U12_MUX_S1
component class MUX_LED5: C44_MUX_LED5 C45_MUX_LED5 R27_MUX_LED5 U12_MUX_LED5
component class MUX_LED4: C44_MUX_LED4 C45_MUX_LED4 R27_MUX_LED4 U12_MUX_LED4
component class MUX_LED3: C44_MUX_LED3 C45_MUX_LED3 R27_MUX_LED3 U12_MUX_LED3
component class MUX_LED2: C44_MUX_LED2 C45_MUX_LED2 R27_MUX_LED2 U12_MUX_LED2
component class MUX_LED1: C44_MUX_LED1 C45_MUX_LED1 R27_MUX_LED1 U12_MUX_LED1
component class AC84: C17_AC84 C20_AC84 C21_AC84 D1_AC84 D2_AC84 R8_AC84 R10_AC84 U4_AC84
component class AC83: C17_AC83 C20_AC83 C21_AC83 D1_AC83 D2_AC83 R8_AC83 R10_AC83 U4_AC83
component class AC82: C17_AC82 C20_AC82 C21_AC82 D1_AC82 D2_AC82 R8_AC82 R10_AC82 U4_AC82
component class AC81: C17_AC81 C20_AC81 C21_AC81 D1_AC81 D2_AC81 R8_AC81 R10_AC81 U4_AC81
component class AC74: C17_AC74 C20_AC74 C21_AC74 D1_AC74 D2_AC74 R8_AC74 R10_AC74 U4_AC74
component class AC73: C17_AC73 C20_AC73 C21_AC73 D1_AC73 D2_AC73 R8_AC73 R10_AC73 U4_AC73
component class AC72: C17_AC72 C20_AC72 C21_AC72 D1_AC72 D2_AC72 R8_AC72 R10_AC72 U4_AC72
component class AC71: C17_AC71 C20_AC71 C21_AC71 D1_AC71 D2_AC71 R8_AC71 R10_AC71 U4_AC71
component class AC64: C17_AC64 C20_AC64 C21_AC64 D1_AC64 D2_AC64 R8_AC64 R10_AC64 U4_AC64
component class AC63: C17_AC63 C20_AC63 C21_AC63 D1_AC63 D2_AC63 R8_AC63 R10_AC63 U4_AC63
component class AC62: C17_AC62 C20_AC62 C21_AC62 D1_AC62 D2_AC62 R8_AC62 R10_AC62 U4_AC62
component class AC61: C17_AC61 C20_AC61 C21_AC61 D1_AC61 D2_AC61 R8_AC61 R10_AC61 U4_AC61
component class AC54: C17_AC54 C20_AC54 C21_AC54 D1_AC54 D2_AC54 R8_AC54 R10_AC54 U4_AC54
component class AC53: C17_AC53 C20_AC53 C21_AC53 D1_AC53 D2_AC53 R8_AC53 R10_AC53 U4_AC53
component class AC52: C17_AC52 C20_AC52 C21_AC52 D1_AC52 D2_AC52 R8_AC52 R10_AC52 U4_AC52
component class AC51: C17_AC51 C20_AC51 C21_AC51 D1_AC51 D2_AC51 R8_AC51 R10_AC51 U4_AC51
component class AC44: C17_AC44 C20_AC44 C21_AC44 D1_AC44 D2_AC44 R8_AC44 R10_AC44 U4_AC44
component class AC43: C17_AC43 C20_AC43 C21_AC43 D1_AC43 D2_AC43 R8_AC43 R10_AC43 U4_AC43
component class AC42: C17_AC42 C20_AC42 C21_AC42 D1_AC42 D2_AC42 R8_AC42 R10_AC42 U4_AC42
component class AC41: C17_AC41 C20_AC41 C21_AC41 D1_AC41 D2_AC41 R8_AC41 R10_AC41 U4_AC41
component class AC34: C17_AC34 C20_AC34 C21_AC34 D1_AC34 D2_AC34 R8_AC34 R10_AC34 U4_AC34
component class AC33: C17_AC33 C20_AC33 C21_AC33 D1_AC33 D2_AC33 R8_AC33 R10_AC33 U4_AC33
component class AC32: C17_AC32 C20_AC32 C21_AC32 D1_AC32 D2_AC32 R8_AC32 R10_AC32 U4_AC32
component class AC31: C17_AC31 C20_AC31 C21_AC31 D1_AC31 D2_AC31 R8_AC31 R10_AC31 U4_AC31
component class AC25: C17_AC25 C20_AC25 C21_AC25 D1_AC25 D2_AC25 R8_AC25 R10_AC25 U4_AC25
component class AC24: C17_AC24 C20_AC24 C21_AC24 D1_AC24 D2_AC24 R8_AC24 R10_AC24 U4_AC24
component class AC23: C17_AC23 C20_AC23 C21_AC23 D1_AC23 D2_AC23 R8_AC23 R10_AC23 U4_AC23
component class AC22: C17_AC22 C20_AC22 C21_AC22 D1_AC22 D2_AC22 R8_AC22 R10_AC22 U4_AC22
component class AC21: C17_AC21 C20_AC21 C21_AC21 D1_AC21 D2_AC21 R8_AC21 R10_AC21 U4_AC21
component class AC15: C17_AC15 C20_AC15 C21_AC15 D1_AC15 D2_AC15 R8_AC15 R10_AC15 U4_AC15
component class AC14: C17_AC14 C20_AC14 C21_AC14 D1_AC14 D2_AC14 R8_AC14 R10_AC14 U4_AC14
component class AC13: C17_AC13 C20_AC13 C21_AC13 D1_AC13 D2_AC13 R8_AC13 R10_AC13 U4_AC13
component class AC12: C17_AC12 C20_AC12 C21_AC12 D1_AC12 D2_AC12 R8_AC12 R10_AC12 U4_AC12
component class AC11: C17_AC11 C20_AC11 C21_AC11 D1_AC11 D2_AC11 R8_AC11 R10_AC11 U4_AC11

## Components (designator, comment, footprint, x,y, rotation, side; value= is the part's Value field where it differs from the comment)
C1 "10uF" 1608[0603] 74.955,31.064 r270 top
C1 "0.1uF" 0402#1 75.9,29.85 r90 bottom
C2 "100pF" 0402#1 75,29.85 r90 bottom
C2 "10uF" 1608[0603] 73.609,30.658 r270 top
C3 "10uF" 1608[0603] 73.75,28.094 r90 top
C3 "150nF" 0402#1 73.475,29.775 r180 bottom
C4 "10uF" 1608[0603] 74.955,27.686 r90 top
C5 "10uF" 1608[0603] 53.975,27.85 r90 top
C6 "10uF" 1608[0603] 55.347,28.177 r90 top
C7 "10uF" 1608[0603] 55.347,30.721 r270 top
C8 "10uF" 1608[0603] 53.975,31.148 r270 top
C9 "0.1uF" 0402#1 65.405,30.505 r90 top
C10 "10uF" 1608[0603] 66.743,32.225 r90 top
C11 "0.1uF" 0402#1 64.999,32.715 r180 top
C12 "Cap Semi" 0402#1 80.701,23.9 r180 top value=0.1uF
C13 "0.47uF" 1608[0603] 49.075,28.1 r270 bottom
C14 "10uF" 1608[0603] 68.75,33.225 r180 top
C15 "0.1uF" 0402#1 69.225,32.182 r180 top
C16 "4.7uF" 1608[0603] 66.743,29.71 r270 top
C17_AC11 "1pF" 0402#1 17.648,13.251 r90 bottom (schematic designator C17)
C17_AC12 "1pF" 0402#1 11.507,52.287 r90 bottom (schematic designator C17)
C17_AC13 "1pF" 0402#1 62.438,40.907 r0 bottom (schematic designator C17)
C17_AC14 "1pF" 0402#1 80.39,1.86 r270 bottom (schematic designator C17)
C17_AC15 "1pF" 0402#1 111.69,52.311 r90 bottom (schematic designator C17)
C17_AC21 "1pF" 0402#1 16.388,1.765 r270 bottom (schematic designator C17)
C17_AC22 "1pF" 0402#1 22.326,40.747 r270 bottom (schematic designator C17)
C17_AC23 "1pF" 0402#1 75.593,52.316 r90 bottom (schematic designator C17)
C17_AC24 "1pF" 0402#1 62.5,17.652 r0 bottom (schematic designator C17)
C17_AC25 "1pF" 0402#1 116.364,1.843 r270 bottom (schematic designator C17)
C17_AC31 "1pF" 0402#1 10.331,17.836 r0 bottom (schematic designator C17)
C17_AC32 "1pF" 0402#1 23.596,52.369 r90 bottom (schematic designator C17)
C17_AC33 "1pF" 0402#1 86.386,40.705 r270 bottom (schematic designator C17)
C17_AC34 "1pF" 0402#1 65.616,13.187 r180 bottom (schematic designator C17)
C17_AC41 "1pF" 0402#1 28.25,1.765 r270 bottom (schematic designator C17)
C17_AC42 "1pF" 0402#1 10.196,40.849 r0 bottom (schematic designator C17)
C17_AC43 "1pF" 0402#1 65.586,36.14 r180 bottom (schematic designator C17)
C17_AC44 "1pF" 0402#1 81.632,13.336 r90 bottom (schematic designator C17)
C17_AC51 "1pF" 0402#1 52.38,1.858 r270 bottom (schematic designator C17)
C17_AC52 "1pF" 0402#1 46.457,40.679 r270 bottom (schematic designator C17)
C17_AC53 "1pF" 0402#1 110.358,40.705 r270 bottom (schematic designator C17)
C17_AC54 "1pF" 0402#1 105.644,13.372 r90 bottom (schematic designator C17)
C17_AC61 "1pF" 0402#1 29.592,13.406 r90 bottom (schematic designator C17)
C17_AC62 "1pF" 0402#1 34.366,40.781 r270 bottom (schematic designator C17)
C17_AC63 "1pF" 0402#1 87.637,52.268 r90 bottom (schematic designator C17)
C17_AC64 "1pF" 0402#1 92.304,1.812 r270 bottom (schematic designator C17)
C17_AC71 "1pF" 0402#1 41.58,13.367 r90 bottom (schematic designator C17)
C17_AC72 "1pF" 0402#1 47.695,52.239 r90 bottom (schematic designator C17)
C17_AC73 "1pF" 0402#1 99.669,52.285 r90 bottom (schematic designator C17)
C17_AC74 "1pF" 0402#1 104.393,1.858 r270 bottom (schematic designator C17)
C17_AC81 "1pF" 0402#1 40.334,1.858 r270 bottom (schematic designator C17)
C17_AC82 "1pF" 0402#1 35.732,52.259 r90 bottom (schematic designator C17)
C17_AC83 "1pF" 0402#1 98.372,40.748 r270 bottom (schematic designator C17)
C17_AC84 "1pF" 0402#1 93.605,13.378 r90 bottom (schematic designator C17)
C18 "0.1uF" 0402#1 123.469,33.271 r270 bottom value=1pF
C19 "0.1uF" 0402#1 120.625,32.182 r0 bottom
C20_AC11 "0.1uF" 0402#1 21.864,13.251 r90 bottom (schematic designator C20)
C20_AC12 "0.1uF" 0402#1 15.724,52.287 r90 bottom (schematic designator C20)
C20_AC13 "0.1uF" 0402#1 62.438,36.69 r0 bottom (schematic designator C20)
C20_AC14 "0.1uF" 0402#1 76.174,1.86 r270 bottom (schematic designator C20)
C20_AC15 "0.1uF" 0402#1 115.906,52.311 r90 bottom (schematic designator C20)
C20_AC21 "0.1uF" 0402#1 12.171,1.765 r270 bottom (schematic designator C20)
C20_AC22 "0.1uF" 0402#1 18.11,40.747 r270 bottom (schematic designator C20)
C20_AC23 "0.1uF" 0402#1 79.81,52.316 r90 bottom (schematic designator C20)
C20_AC24 "0.1uF" 0402#1 62.5,13.436 r0 bottom (schematic designator C20)
C20_AC25 "0.1uF" 0402#1 112.147,1.843 r270 bottom (schematic designator C20)
C20_AC31 "0.1uF" 0402#1 10.331,13.619 r0 bottom (schematic designator C20)
C20_AC32 "0.1uF" 0402#1 27.813,52.369 r90 bottom (schematic designator C20)
C20_AC33 "0.1uF" 0402#1 82.169,40.705 r270 bottom (schematic designator C20)
C20_AC34 "0.1uF" 0402#1 65.616,17.403 r180 bottom (schematic designator C20)
C20_AC41 "0.1uF" 0402#1 24.033,1.765 r270 bottom (schematic designator C20)
C20_AC42 "0.1uF" 0402#1 10.196,36.633 r0 bottom (schematic designator C20)
C20_AC43 "0.1uF" 0402#1 65.586,40.356 r180 bottom (schematic designator C20)
C20_AC44 "0.1uF" 0402#1 85.849,13.336 r90 bottom (schematic designator C20)
C20_AC51 "0.1uF" 0402#1 48.163,1.858 r270 bottom (schematic designator C20)
C20_AC52 "0.1uF" 0402#1 42.24,40.679 r270 bottom (schematic designator C20)
C20_AC53 "0.1uF" 0402#1 106.142,40.705 r270 bottom (schematic designator C20)
C20_AC54 "0.1uF" 0402#1 109.861,13.372 r90 bottom (schematic designator C20)
C20_AC61 "0.1uF" 0402#1 33.808,13.406 r90 bottom (schematic designator C20)
C20_AC62 "0.1uF" 0402#1 30.15,40.781 r270 bottom (schematic designator C20)
C20_AC63 "0.1uF" 0402#1 91.853,52.268 r90 bottom (schematic designator C20)
C20_AC64 "0.1uF" 0402#1 88.087,1.812 r270 bottom (schematic designator C20)
C20_AC71 "0.1uF" 0402#1 45.797,13.367 r90 bottom (schematic designator C20)
C20_AC72 "0.1uF" 0402#1 51.911,52.239 r90 bottom (schematic designator C20)
C20_AC73 "0.1uF" 0402#1 103.886,52.285 r90 bottom (schematic designator C20)
C20_AC74 "0.1uF" 0402#1 100.177,1.858 r270 bottom (schematic designator C20)
C20_AC81 "0.1uF" 0402#1 36.118,1.858 r270 bottom (schematic designator C20)
C20_AC82 "0.1uF" 0402#1 39.948,52.259 r90 bottom (schematic designator C20)
C20_AC83 "0.1uF" 0402#1 94.156,40.748 r270 bottom (schematic designator C20)
C20_AC84 "0.1uF" 0402#1 97.821,13.378 r90 bottom (schematic designator C20)
C21_AC11 "1uF" 1608[0603] 22.982,12.969 r90 bottom (schematic designator C21)
C21_AC12 "1uF" 1608[0603] 16.841,52.005 r90 bottom (schematic designator C21)
C21_AC13 "1uF" 1608[0603] 62.156,35.573 r0 bottom (schematic designator C21)
C21_AC14 "1uF" 1608[0603] 75.056,2.142 r270 bottom (schematic designator C21)
C21_AC15 "1uF" 1608[0603] 117.024,52.029 r90 bottom (schematic designator C21)
C21_AC21 "1uF" 1608[0603] 11.054,2.047 r270 bottom (schematic designator C21)
C21_AC22 "1uF" 1608[0603] 16.992,41.029 r270 bottom (schematic designator C21)
C21_AC23 "1uF" 1608[0603] 80.927,52.034 r90 bottom (schematic designator C21)
C21_AC24 "1uF" 1608[0603] 62.218,12.318 r0 bottom (schematic designator C21)
C21_AC25 "1uF" 1608[0603] 111.03,2.125 r270 bottom (schematic designator C21)
C21_AC31 "1uF" 1608[0603] 10.05,12.502 r0 bottom (schematic designator C21)
C21_AC32 "1uF" 1608[0603] 28.93,52.087 r90 bottom (schematic designator C21)
C21_AC33 "1uF" 1608[0603] 81.052,40.987 r270 bottom (schematic designator C21)
C21_AC34 "1uF" 1608[0603] 65.898,18.521 r180 bottom (schematic designator C21)
C21_AC41 "1uF" 1608[0603] 22.916,2.047 r270 bottom (schematic designator C21)
C21_AC42 "1uF" 1608[0603] 9.914,35.515 r0 bottom (schematic designator C21)
C21_AC43 "1uF" 1608[0603] 65.868,41.474 r180 bottom (schematic designator C21)
C21_AC44 "1uF" 1608[0603] 86.966,13.054 r90 bottom (schematic designator C21)
C21_AC51 "1uF" 1608[0603] 47.046,2.139 r270 bottom (schematic designator C21)
C21_AC52 "1uF" 1608[0603] 41.123,40.961 r270 bottom (schematic designator C21)
C21_AC53 "1uF" 1608[0603] 105.024,40.987 r270 bottom (schematic designator C21)
C21_AC54 "1uF" 1608[0603] 110.978,13.091 r90 bottom (schematic designator C21)
C21_AC61 "1uF" 1608[0603] 34.926,13.124 r90 bottom (schematic designator C21)
C21_AC62 "1uF" 1608[0603] 29.032,41.063 r270 bottom (schematic designator C21)
C21_AC63 "1uF" 1608[0603] 92.971,51.986 r90 bottom (schematic designator C21)
C21_AC64 "1uF" 1608[0603] 86.97,2.094 r270 bottom (schematic designator C21)
C21_AC71 "1uF" 1608[0603] 46.914,13.085 r90 bottom (schematic designator C21)
C21_AC72 "1uF" 1608[0603] 53.029,51.957 r90 bottom (schematic designator C21)
C21_AC73 "1uF" 1608[0603] 105.003,52.003 r90 bottom (schematic designator C21)
C21_AC74 "1uF" 1608[0603] 99.059,2.139 r270 bottom (schematic designator C21)
C21_AC81 "1uF" 1608[0603] 35,2.139 r270 bottom (schematic designator C21)
C21_AC82 "1uF" 1608[0603] 41.066,51.977 r90 bottom (schematic designator C21)
C21_AC83 "1uF" 1608[0603] 93.038,41.03 r270 bottom (schematic designator C21)
C21_AC84 "1uF" 1608[0603] 98.939,13.096 r90 bottom (schematic designator C21)
C22 "1uF" 1608[0603] 124.384,21.26 r90 bottom
C23 "0.1uF" 0402#1 123.266,21.564 r90 bottom
C24 "1uF" 1608[0603] 120.345,31.039 r0 bottom
C25_SD1 "2pF" 0402#1 35.25,18.364 r90 top (schematic designator C25)
C25_SD2 "2pF" 0402#1 34.417,31.293 r90 top (schematic designator C25)
C25_SD3 "2pF" 0402#1 97.458,31.79 r90 top (schematic designator C25)
C25_SD4 "2pF" 0402#1 98.358,18.085 r90 top (schematic designator C25)
C26_SD1 "2pF" 0402#1 37.744,18.415 r90 top (schematic designator C26)
C26_SD2 "2pF" 0402#1 36.932,31.344 r90 top (schematic designator C26)
C26_SD3 "2pF" 0402#1 99.972,31.841 r90 top (schematic designator C26)
C26_SD4 "2pF" 0402#1 100.852,18.136 r90 top (schematic designator C26)
C27_SD1 "0.1uF" 0402#1 23.139,21.304 r180 bottom (schematic designator C27)
C27_SD2 "0.1uF" 0402#1 23.341,34.12 r90 bottom (schematic designator C27)
C27_SD3 "0.1uF" 0402#1 86.182,34.671 r90 bottom (schematic designator C27)
C27_SD4 "0.1uF" 0402#1 87.02,21.524 r180 bottom (schematic designator C27)
C28_SD1 "0.1uF" 0402#1 30.814,22.098 r0 bottom (schematic designator C28)
C28_SD2 "0.1uF" 0402#1 30.425,35.244 r0 bottom (schematic designator C28)
C28_SD3 "0.1uF" 0402#1 93.466,35.742 r0 bottom (schematic designator C28)
C28_SD4 "0.1uF" 0402#1 93.828,21.844 r0 bottom (schematic designator C28)
C29_SD1 "0.1uF" 0402#1 41.758,23.393 r270 bottom (schematic designator C29)
C29_SD2 "0.1uF" 0402#1 41.297,36.217 r270 bottom (schematic designator C29)
C29_SD3 "0.1uF" 0402#1 104.337,36.715 r270 bottom (schematic designator C29)
C29_SD4 "0.1uF" 0402#1 104.865,23.114 r270 bottom (schematic designator C29)
C30_SD1 "0.1uF" 0402#1 33.076,25.044 r180 bottom (schematic designator C30)
C30_SD2 "0.1uF" 0402#1 32.4,37.335 r180 bottom (schematic designator C30)
C30_SD3 "0.1uF" 0402#1 95.441,37.832 r180 bottom (schematic designator C30)
C30_SD4 "0.1uF" 0402#1 96.063,24.181 r180 bottom (schematic designator C30)
C31_SD1 "10uF" 1608[0603] 43.002,23.089 r90 bottom (schematic designator C31)
C31_SD2 "10uF" 1608[0603] 42.393,36.093 r90 bottom (schematic designator C31)
C31_SD3 "10uF" 1608[0603] 105.433,36.591 r90 bottom (schematic designator C31)
C31_SD4 "10uF" 1608[0603] 106.11,22.809 r90 bottom (schematic designator C31)
C32_SD1 "0.1uF" 0402#1 28.448,18.161 r0 bottom (schematic designator C32)
C32_SD2 "0.1uF" 0402#1 27.835,31.206 r0 bottom (schematic designator C32)
C32_SD3 "0.1uF" 0402#1 90.907,31.572 r0 bottom (schematic designator C32)
C32_SD4 "0.1uF" 0402#1 91.491,17.602 r0 bottom (schematic designator C32)
C33_SD1 "10uF" 1608[0603] 28.702,17.018 r0 bottom (schematic designator C33)
C33_SD2 "10uF" 1608[0603] 28.114,30.063 r0 bottom (schematic designator C33)
C33_SD3 "10uF" 1608[0603] 91.161,30.404 r0 bottom (schematic designator C33)
C33_SD4 "10uF" 1608[0603] 91.77,16.531 r0 bottom (schematic designator C33)
C34_SD1 "0.1uF" 0402#1 28.502,24.638 r180 bottom (schematic designator C34)
C34_SD2 "0.1uF" 0402#1 28.052,37.552 r180 bottom (schematic designator C34)
C34_SD3 "0.1uF" 0402#1 90.881,38.176 r180 bottom (schematic designator C34)
C34_SD4 "0.1uF" 0402#1 91.542,24.486 r180 bottom (schematic designator C34)
C35_SD1 "10uF" 1608[0603] 42.901,18.44 r0 bottom (schematic designator C35)
C35_SD2 "10uF" 1608[0603] 43.202,31.51 r0 bottom (schematic designator C35)
C35_SD3 "10uF" 1608[0603] 105.983,31.953 r0 bottom (schematic designator C35)
C35_SD4 "10uF" 1608[0603] 105.461,17.864 r0 bottom (schematic designator C35)
C36_SD1 "0.1uF" 0402#1 42.596,17.348 r0 bottom (schematic designator C36)
C36_SD2 "0.1uF" 0402#1 43.506,30.418 r0 bottom (schematic designator C36)
C36_SD3 "0.1uF" 0402#1 105.689,30.886 r0 bottom (schematic designator C36)
C36_SD4 "0.1uF" 0402#1 104.256,16.739 r0 bottom (schematic designator C36)
C37 "0.47uF" 1608[0603] 54.26,28.1 r270 bottom
C44_MUX_LED1 "0.1uF" 0402#1 44.628,18.288 r180 top (schematic designator C44)
C44_MUX_LED2 "0.1uF" 0402#1 44.577,31.471 r180 top (schematic designator C44)
C44_MUX_LED3 "0.1uF" 0402#1 108.509,31.242 r180 top (schematic designator C44)
C44_MUX_LED4 "0.1uF" 0402#1 107.036,18.031 r180 top (schematic designator C44)
C44_MUX_LED5 "0.1uF" 0402#1 117.221,23.673 r180 top (schematic designator C44)
C44_MUX_S1 "0.1uF" 0402#1 13.778,21.243 r180 bottom (schematic designator C44)
C44_MUX_S2 "0.1uF" 0402#1 14.388,36.398 r180 bottom (schematic designator C44)
C44_MUX_S3 "0.1uF" 0402#1 77.126,37.414 r180 bottom (schematic designator C44)
C44_MUX_S4 "0.1uF" 0402#1 77.132,21.229 r180 bottom (schematic designator C44)
C44_MUX_S5 "0.1uF" 0402#1 116.85,23.851 r0 bottom (schematic designator C44)
C45_MUX_LED1 "10uF" 1608[0603] 45.636,17.272 r180 top (schematic designator C45)
C45_MUX_LED2 "10uF" 1608[0603] 45.263,30.378 r180 top (schematic designator C45)
C45_MUX_LED3 "10uF" 1608[0603] 108.226,30.201 r180 top (schematic designator C45)
C45_MUX_LED4 "10uF" 1608[0603] 108.61,16.916 r180 top (schematic designator C45)
C45_MUX_LED5 "10uF" 1608[0603] 117.526,22.606 r180 top (schematic designator C45)
C45_MUX_S1 "10uF" 1608[0603] 15.912,22.335 r180 bottom (schematic designator C45)
C45_MUX_S2 "10uF" 1608[0603] 16.521,37.49 r180 bottom (schematic designator C45)
C45_MUX_S3 "10uF" 1608[0603] 79.259,38.506 r180 bottom (schematic designator C45)
C45_MUX_S4 "10uF" 1608[0603] 79.265,22.321 r180 bottom (schematic designator C45)
C45_MUX_S5 "10uF" 1608[0603] 116.549,22.825 r0 bottom (schematic designator C45)
D1_AC11 "LED2" "LB P4SG" 19.933,4.9 r270 top (schematic designator D1)
D1_AC12 "LED2" "LB P4SG" 13.97,44.171 r90 top (schematic designator D1)
D1_AC13 "LED2" "LB P4SG" 54.985,38.472 r270 top (schematic designator D1)
D1_AC14 "LED2" "LB P4SG" 77.902,10.109 r270 top (schematic designator D1)
D1_AC15 "LED2" "LB P4SG" 113.976,44.222 r90 top (schematic designator D1)
D1_AC21 "LED2" "LB P4SG" 13.925,9.881 r270 top (schematic designator D1)
D1_AC22 "LED2" "LB P4SG" 20.041,49.098 r90 top (schematic designator D1)
D1_AC23 "LED2" "LB P4SG" 78.035,44.171 r90 top (schematic designator D1)
D1_AC24 "LED2" "LB P4SG" 54.864,15.257 r90 top (schematic designator D1)
D1_AC25 "LED2" "LB P4SG" 113.875,10.093 r270 top (schematic designator D1)
D1_AC31 "LED2" "LB P4SG" 2.515,15.57 r90 top (schematic designator D1)
D1_AC32 "LED2" "LB P4SG" 25.883,44.28 r90 top (schematic designator D1)
D1_AC33 "LED2" "LB P4SG" 84.099,48.793 r90 top (schematic designator D1)
D1_AC34 "LED2" "LB P4SG" 73.121,15.392 r90 top (schematic designator D1)
D1_AC41 "LED2" "LB P4SG" 25.787,9.881 r270 top (schematic designator D1)
D1_AC42 "LED2" "LB P4SG" 2.388,38.557 r90 top (schematic designator D1)
D1_AC43 "LED2" "LB P4SG" 73.05,38.659 r270 top (schematic designator D1)
D1_AC44 "LED2" "LB P4SG" 83.918,5.247 r270 top (schematic designator D1)
D1_AC51 "LED2" "LB P4SG" 49.917,9.974 r270 top (schematic designator D1)
D1_AC52 "LED2" "LB P4SG" 43.968,48.929 r90 top (schematic designator D1)
D1_AC53 "LED2" "LB P4SG" 108.072,48.793 r90 top (schematic designator D1)
D1_AC54 "LED2" "LB P4SG" 107.931,5.284 r270 top (schematic designator D1)
D1_AC61 "LED2" "LB P4SG" 31.902,5.055 r270 top (schematic designator D1)
D1_AC62 "LED2" "LB P4SG" 32.08,48.87 r90 top (schematic designator D1)
D1_AC63 "LED2" "LB P4SG" 90.125,44.019 r90 top (schematic designator D1)
D1_AC64 "LED2" "LB P4SG" 89.882,10.058 r270 top (schematic designator D1)
D1_AC71 "LED2" "LB P4SG" 43.866,5.016 r270 top (schematic designator D1)
D1_AC72 "LED2" "LB P4SG" 49.981,44.15 r90 top (schematic designator D1)
D1_AC73 "LED2" "LB P4SG" 101.956,44.196 r90 top (schematic designator D1)
D1_AC74 "LED2" "LB P4SG" 101.905,10.107 r270 top (schematic designator D1)
D1_AC81 "LED2" "LB P4SG" 37.871,9.974 r270 top (schematic designator D1)
D1_AC82 "LED2" "LB P4SG" 38.018,44.171 r90 top (schematic designator D1)
D1_AC83 "LED2" "LB P4SG" 95.907,48.8 r90 top (schematic designator D1)
D1_AC84 "LED2" "LB P4SG" 95.891,5.29 r270 top (schematic designator D1)
D2_AC11 "VBPW34SR" VBPW34SR 20.008,9.658 r180 top (schematic designator D2)
D2_AC12 "VBPW34SR" VBPW34SR 13.867,48.694 r180 top (schematic designator D2)
D2_AC13 "VBPW34SR" VBPW34SR 58.845,38.547 r90 top (schematic designator D2)
D2_AC14 "VBPW34SR" VBPW34SR 78.03,5.453 r0 top (schematic designator D2)
D2_AC15 "VBPW34SR" VBPW34SR 114.05,48.718 r180 top (schematic designator D2)
D2_AC21 "VBPW34SR" VBPW34SR 14.028,5.358 r0 top (schematic designator D2)
D2_AC22 "VBPW34SR" VBPW34SR 19.966,44.34 r0 top (schematic designator D2)
D2_AC23 "VBPW34SR" VBPW34SR 77.953,48.723 r180 top (schematic designator D2)
D2_AC24 "VBPW34SR" VBPW34SR 58.764,15.418 r90 top (schematic designator D2)
D2_AC25 "VBPW34SR" VBPW34SR 114.004,5.436 r0 top (schematic designator D2)
D2_AC31 "VBPW34SR" VBPW34SR 6.739,15.476 r90 top (schematic designator D2)
D2_AC32 "VBPW34SR" VBPW34SR 25.956,48.776 r180 top (schematic designator D2)
D2_AC33 "VBPW34SR" VBPW34SR 84.026,44.298 r0 top (schematic designator D2)
D2_AC34 "VBPW34SR" VBPW34SR 69.209,15.547 r270 top (schematic designator D2)
D2_AC41 "VBPW34SR" VBPW34SR 25.89,5.358 r0 top (schematic designator D2)
D2_AC42 "VBPW34SR" VBPW34SR 6.603,38.489 r90 top (schematic designator D2)
D2_AC43 "VBPW34SR" VBPW34SR 69.179,38.5 r270 top (schematic designator D2)
D2_AC44 "VBPW34SR" VBPW34SR 83.992,9.743 r180 top (schematic designator D2)
D2_AC51 "VBPW34SR" VBPW34SR 50.02,5.45 r0 top (schematic designator D2)
D2_AC52 "VBPW34SR" VBPW34SR 44.097,44.272 r0 top (schematic designator D2)
D2_AC53 "VBPW34SR" VBPW34SR 107.998,44.298 r0 top (schematic designator D2)
D2_AC54 "VBPW34SR" VBPW34SR 108.004,9.78 r180 top (schematic designator D2)
D2_AC61 "VBPW34SR" VBPW34SR 31.952,9.813 r180 top (schematic designator D2)
D2_AC62 "VBPW34SR" VBPW34SR 32.006,44.374 r0 top (schematic designator D2)
D2_AC63 "VBPW34SR" VBPW34SR 89.997,48.675 r180 top (schematic designator D2)
D2_AC64 "VBPW34SR" VBPW34SR 89.944,5.405 r0 top (schematic designator D2)
D2_AC71 "VBPW34SR" VBPW34SR 43.94,9.774 r180 top (schematic designator D2)
D2_AC72 "VBPW34SR" VBPW34SR 50.055,48.646 r180 top (schematic designator D2)
D2_AC73 "VBPW34SR" VBPW34SR 102.029,48.692 r180 top (schematic designator D2)
D2_AC74 "VBPW34SR" VBPW34SR 102.033,5.45 r0 top (schematic designator D2)
D2_AC81 "VBPW34SR" VBPW34SR 37.974,5.45 r0 top (schematic designator D2)
D2_AC82 "VBPW34SR" VBPW34SR 38.092,48.666 r180 top (schematic designator D2)
D2_AC83 "VBPW34SR" VBPW34SR 96.012,44.341 r0 top (schematic designator D2)
D2_AC84 "VBPW34SR" VBPW34SR 95.965,9.785 r180 top (schematic designator D2)
D3 "LED2" 0603-LED 74.5,21 r270 top
J1 "COAX-F" MCX5.08-H5 121.648,15.766 r90 top
J2 "COAX-F" MCX5.08-H5 121.314,39.477 r90 top
P1 "Header 10X2" CON20_2X10_DUA00 64,24 r180 bottom
R1 "10K Quad" ResQuad-320X150 57.582,32.385 r0 top
R2 "1K Quad" ResQuad-320X150 52.172,29.497 r270 top
R3 "10K" 0402#2 72.075,32.69 r270 top
R3 "10K" 0402#2 65.425,33.725 r0 bottom
R4 "10K" 0402#2 70.985,32.69 r270 top
R4 "10K" 0402#2 65.425,32.766 r0 bottom
R5 "1K Quad" ResQuad-320X150 76.759,29.388 r90 top
R6 "Res3" 0402#2 83.287,22.428 r0 top value=1K
R7 "Res3" 0402#2 83.275,26.213 r270 top value=10K
R8_AC11 "330" 0402#2 26.238,14.859 r270 top (schematic designator R8)
R8_AC12 "330" 0402#2 13.208,39.497 r90 top (schematic designator R8)
R8_AC13 "330" 0402#2 77.191,40.538 r180 top (schematic designator R8)
R8_AC14 "330" 0402#2 80.899,14.732 r180 top (schematic designator R8)
R8_AC15 "330" 0402#2 116.002,40.005 r90 top (schematic designator R8)
R8_AC21 "330" 0402#2 17.704,15.773 r180 top (schematic designator R8)
R8_AC22 "330" 0402#2 14.326,39.497 r90 top (schematic designator R8)
R8_AC23 "330" 0402#2 78.969,39.98 r90 top (schematic designator R8)
R8_AC24 "330" 0402#2 77.597,15.062 r180 top (schematic designator R8)
R8_AC25 "330" 0402#2 115.011,16.586 r270 top (schematic designator R8)
R8_AC31 "330" 0402#2 17.729,14.884 r180 top (schematic designator R8)
R8_AC32 "330" 0402#2 25.273,39.548 r90 top (schematic designator R8)
R8_AC33 "330" 0402#2 89.611,40.132 r90 top (schematic designator R8)
R8_AC34 "330" 0402#2 77.572,14.046 r180 top (schematic designator R8)
R8_AC41 "330" 0402#2 27.203,14.859 r270 top (schematic designator R8)
R8_AC42 "330" 0402#2 13.157,37.092 r270 top (schematic designator R8)
R8_AC43 "330" 0402#2 77.165,39.455 r180 top (schematic designator R8)
R8_AC44 "330" 0402#2 91.364,15.164 r180 top (schematic designator R8)
R8_AC51 "330" 0402#2 50.648,14.961 r270 top (schematic designator R8)
R8_AC52 "330" 0402#2 38.354,39.548 r90 top (schematic designator R8)
R8_AC53 "330" 0402#2 112.598,39.954 r90 top (schematic designator R8)
R8_AC54 "330" 0402#2 113.919,16.586 r270 top (schematic designator R8)
R8_AC61 "330" 0402#2 44.755,15.748 r180 top (schematic designator R8)
R8_AC62 "330" 0402#2 26.492,39.548 r90 top (schematic designator R8)
R8_AC63 "330" 0402#2 90.678,40.132 r90 top (schematic designator R8)
R8_AC64 "330" 0402#2 94.005,14.808 r180 top (schematic designator R8)